# Altium PCB PCB1.PcbDoc
Units mil, origin at the board's own origin, x right, y up, seen from the top; angles counter-clockwise.
Board outline 1456.69 x 177.17 mil, 2 copper layers (Top Layer, Bottom Layer); 3 components, 4 nets, 6 pads, 9 vias.
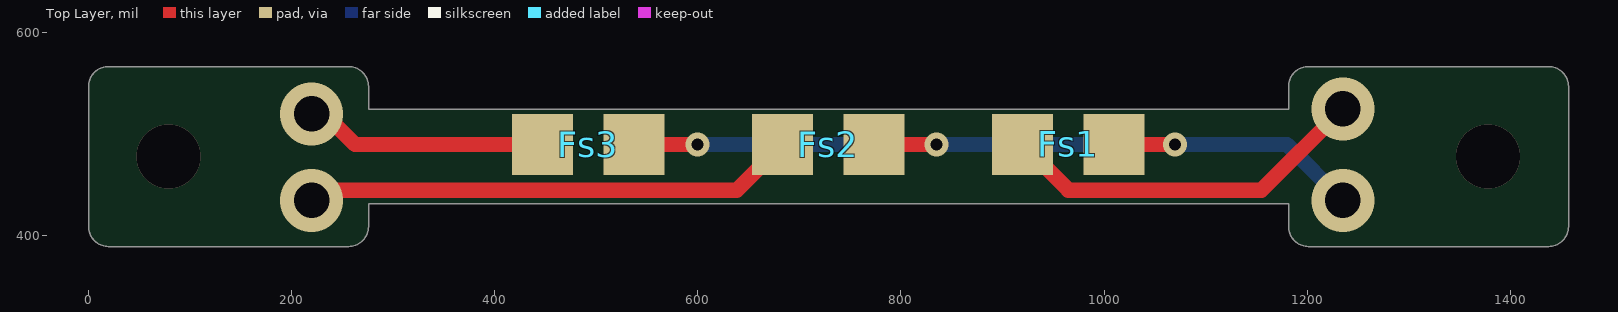
[diagram p0: Top Layer view]
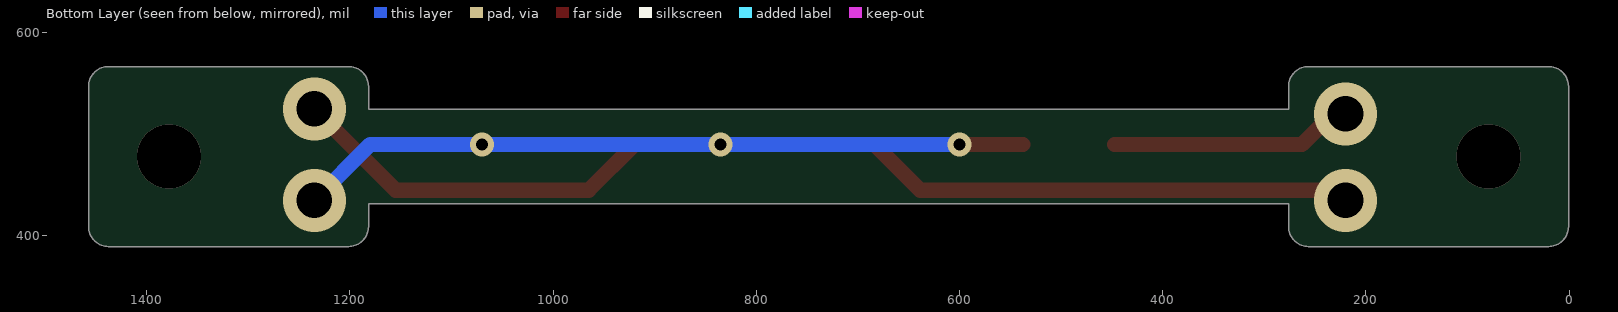
[diagram p1: Bottom Layer view, seen from below]

## Layer stack, top to bottom
Top Solder: solder mask 0.4, Solder Resist, Dk 3.5
Top Layer: signal copper 1.4
Dielectric 1: dielectric 12.6, FR-4, Dk 4.8
Bottom Layer: signal copper 1.4
Bottom Solder: solder mask 0.4, Solder Resist, Dk 3.5

## Board outline
20.18,389.5 cw(c20.18,409.19) 0.5,409.19 0.5,546.98 cw(c20.18,546.98) 20.18,566.67 256.41,566.67 cw(c256.41,546.98) 276.09,546.98 276.09,524.74 1181.6,524.74 1181.6,546.98 cw(c1201.29,546.98) 1201.29,566.67 1437.51,566.67 cw(c1437.51,546.98) 1457.19,546.98 1457.19,409.19 cw(c1437.51,409.19) 1437.51,389.5 1201.29,389.5 cw(c1201.29,409.19) 1181.6,409.19 1181.6,431.43 276.09,431.43 276.09,409.19 cw(c256.41,409.19) 256.41,389.5

## Design rules (kind name [scope] priority, off if disabled: settings)
Clearance [All] p1: gap=10 ignorepadtopadclearanceinfootprint=FALSE except(0: Arc-Hole Track-Hole SMDPad-Hole THPad-Hole Via-Hole Fill-Hole Poly-Hole Region-Hole Text-Hole)
PolygonConnect [All] p1: connectstyle=Relief reliefconductorwidth=10 reliefentries=4 polygonreliefangle="90 Angle" airgapwidth=10
RoutingVias [All] p1: holewidth=28 width=50 viastyle="Through Hole" minholewidth=28 minwidth=50 maxholewidth=28 maxwidth=50
SolderMaskExpansion [All] p1: expansion=4 istentingtop=FALSE
Width [All] p1: maxlimit=10 minlimit=10 preferedwidth=10
30 further rules are at their usual default settings.

## Components (designator, comment, footprint, x,y, rotation, side; value= is the part's Value field where it differs from the comment)
Fs1 "ForceSensor" sensor_connector 964.84,490 r0 top
Fs2 "ForceSensor" sensor_connector 728.6,490 r0 top
Fs3 "ForceSensor" sensor_connector 492.4,490 r0 top

## Footprints (in the part's own frame and the unit in brackets; to place one, negate y for a bottom-side part, rotate by r counter-clockwise, add the part's x,y. Pads: shape width x height; smd on the part's side, far side on the other; paste and mask are expansions set on the pad)
sensor_connector [mil]
  rect 60x60 smd: 0(-45,0) 1(45,0)

## Via types
v1: diameter 62, hole 35, Top Layer to Bottom Layer, 4 vias
v2: diameter 23.62, hole 11.81, Top Layer to Bottom Layer, 3 vias
v3: diameter 62.99, hole 62.99, Top Layer to Bottom Layer, 2 vias

## Nets (pads, with @x,y where several pads share a name; then routed paths per layer and width w, separated by ;. In a path a pad name is that pad's centre, name@x,y a point inside that pad or via, vN(x,y) a via of type N, cw(c..) or ccw(c..) an arc to the next point about the centre after c; other vN are vias at no path point)
FS1: Fs1.0 | length 366.9
  Top Layer w15: Fs1.0 964.84,445 1155,445 v1(1235,525)
FS2: Fs2.0 | length 486.4
  Top Layer w15: v1(220,435) 232.72,435 242.72,445 638.6,445 Fs2.0
FS3: Fs3.0 | length 239.8
  Top Layer w15: v1(220,520) 232.72,520 262.72,490 Fs3.0
GND: Fs1.1 Fs2.1 Fs3.1 | length 841.9
  Top Layer w15: Fs3.1 v2(600,490) ; Fs2.1 v2(835,490) ; Fs1.1 v2(1070,490)
  Bottom Layer w15: v2(600,490) v2(835,490) v2(1070,490) 1180,490 v1(1235,435)
copper on no net:
  other v3: 79.25,478.07 1377.95,478.07

## Silkscreen, mask and mechanical layers (free items; w line width, h text height)
Top 3D Body:
  circle w0.5: c79.24,478.09 r24.61
  circle w0.5: c1377.95,478.07 r24.61
  lines w0.5: 0.5,409.19 ccw(c20.18,409.19) 20.19,389.5 256.41,389.5 ccw(c256.41,409.19) 276.09,409.19 276.09,431.43 1181.6,431.43 1181.6,409.19 ccw(c1201.29,409.19) 1201.29,389.5 1437.51,389.5 ccw(c1437.51,409.19) 1457.19,409.19 1457.19,546.98 ccw(c1437.51,546.98) 1437.51,566.67 1201.29,566.67 ccw(c1201.29,546.98) 1181.6,546.98 1181.6,524.74 276.09,524.74 276.09,546.98 ccw(c256.41,546.98) 256.41,566.67 20.18,566.67 ccw(c20.18,546.98) 0.5,546.98 0.5,409.19